# Altium PCB RP2040-Module.PcbDoc
Units mm, origin at the board's own origin, x right, y up, seen from the top; angles counter-clockwise.
Board outline 11.43 x 17.78 mm, 2 copper layers (Top Layer, Bottom Layer), stack 0.72 mm thick; 17 components, 47 nets, 134 pads, 39 vias.
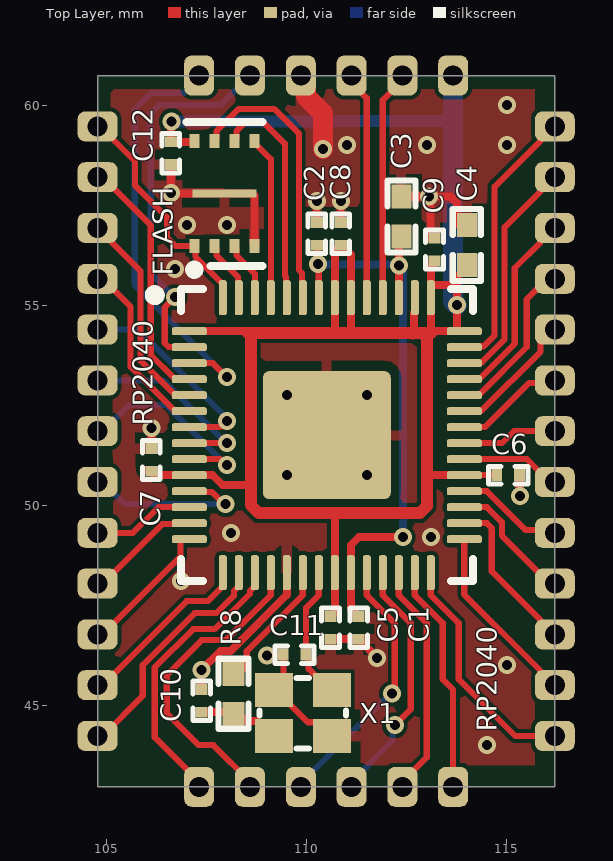
[diagram p0: Top Layer view]
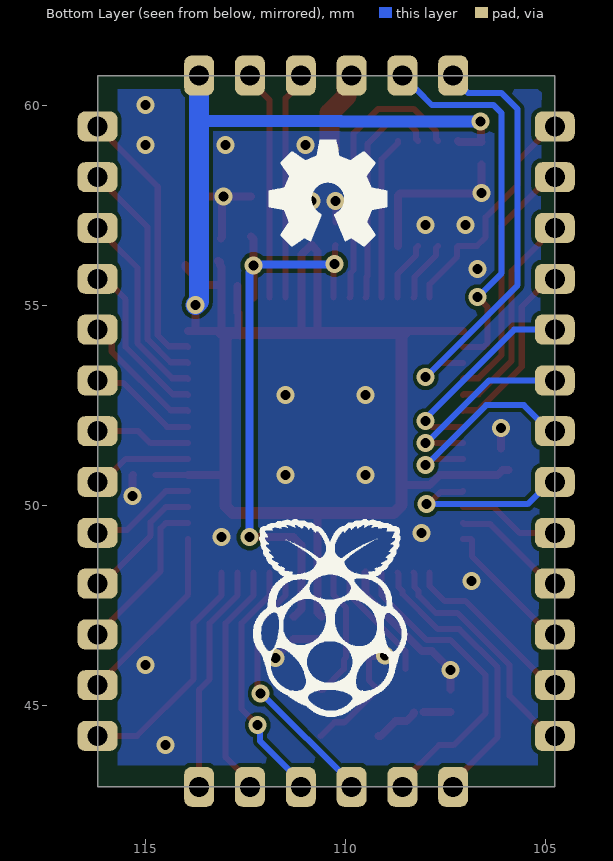
[diagram p1: Bottom Layer view, seen from below]
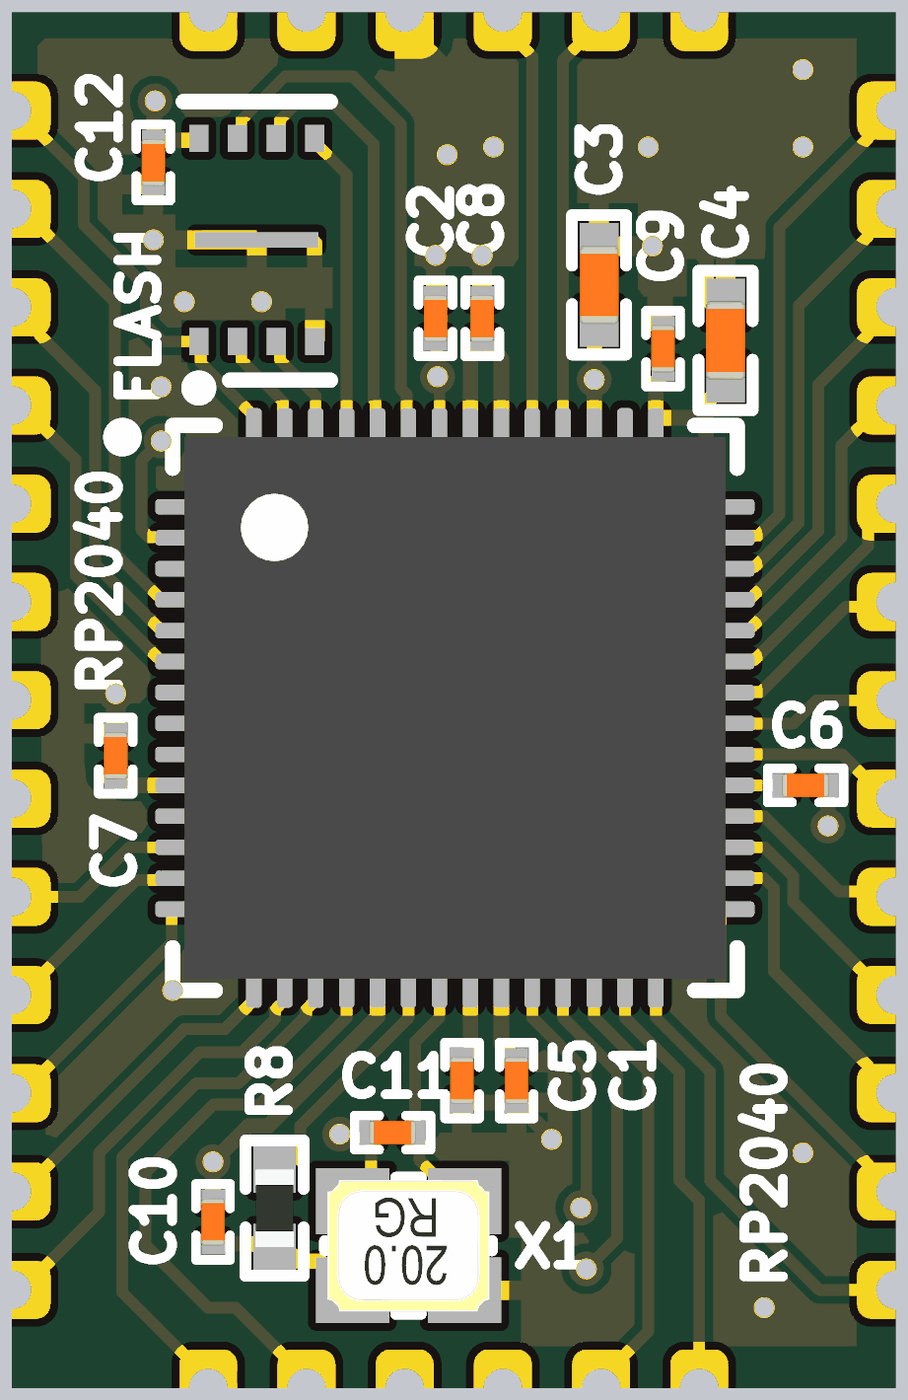
[diagram p2: 3D render of the assembled board from above, using the file's embedded part models]

## Layer stack, top to bottom
Top Solder: solder mask 0.0254, SM-001, Dk 4
Top Layer: signal copper 0.035
Dielectric 1: core 0.65, Core-043, Dk 4.3
Bottom Layer: signal copper 0.035
Bottom Solder: solder mask 0.0254, SM-001, Dk 4

## Board outline
104.77,42.96 116.2,42.96 116.2,60.74 104.77,60.74

## Design rules (kind name [scope] priority, off if disabled: settings)
Clearance [All] p1: gap=0.1 ignorepadtopadclearanceinfootprint=TRUE
ComponentClearance [All] p1 off: gap=0.254 collisioncheckmode=3 verticalgap=0.254 showdistances=FALSE
DiffPairsRouting [InDifferentialPair('DiffPair')] p1: maxlimit=0.254 minlimit=0.089 mostfreqgap=0.2 toplayer_minwidth=0.089 toplayer_maxwidth=0.381 toplayer_prefwidth=0.15 bottomlayer_minwidth=0.089 bottomlayer_maxwidth=0.381 bottomlayer_prefwidth=0.15 maxuncoupledlength=12.7
HoleSize [All] p1 off: absolutevalues=TRUE maxlimit=2.54 minlimit=0.025 maxpercent=80.000 minpercent=20.000
HoleToHoleClearance [All] p1 off: gap=0.254 allowstackedmicrovias=TRUE
MatchedLengths usb [InDifferentialPair('USB')] p1: tolerance=1 checknetsindiffpair=FALSE checkdiffpairvsdiffpair=TRUE checkxsignals=TRUE checkothers=TRUE
MinimumAnnularRing [IsVia] p1: minimumring=0.076
MinimumSolderMaskSliver [All] p1 off: minsoldermaskwidth=0.254
PlaneConnect [InNet('NetC11_2')] p1: planeconnectstyle=Direct reliefexpansion=0.508 reliefentries=4 reliefconductorwidth=0.254 reliefairgap=0.254
PolygonConnect [All] p1: thpad.connectstyle=Relief thpad.reliefconductorwidth=0.254 thpad.reliefentries=4 thpad.polygonreliefangle="90 Angle" thpad.airgapwidth=0.254 smdpad.connectstyle=Relief smdpad.reliefconductorwidth=0.254 smdpad.reliefentries=4 smdpad.polygonreliefangle="90 Angle" smdpad.airgapwidth=0.254 via.connectstyle=Direct via.reliefconductorwidth=0.254 via.reliefentries=4 via.polygonreliefangle="90 Angle" via.airgapwidth=0.254
PolygonConnect 3V3MCU [InNet('NetC11_2')] p2: connectstyle=Direct reliefconductorwidth=0.254 reliefentries=4 polygonreliefangle="90 Angle" airgapwidth=0.254
PolygonConnect VBUSMCU [InNet('NetC12_2')] p3: connectstyle=Direct reliefconductorwidth=0.254 reliefentries=4 polygonreliefangle="90 Angle" airgapwidth=0.254
PolygonConnect VUSB [InNet('VUSB')] p4: connectstyle=Direct reliefconductorwidth=0 reliefentries=4 polygonreliefangle="90 Angle" airgapwidth=0
PolygonConnect viagnd [InNet('GND')] p5: thpad.connectstyle=Relief thpad.reliefconductorwidth=0.254 thpad.reliefentries=4 thpad.polygonreliefangle="90 Angle" thpad.airgapwidth=0.254 smdpad.connectstyle=Relief smdpad.reliefconductorwidth=0.254 smdpad.reliefentries=4 smdpad.polygonreliefangle="90 Angle" smdpad.airgapwidth=0.254 via.connectstyle=Direct via.reliefconductorwidth=0.254 via.reliefentries=4 via.polygonreliefangle="90 Angle" via.airgapwidth=0.254
RoutingVias [All] p1: holewidth=0.2 width=0.4 viastyle="Through Hole" minholewidth=0.1 minwidth=0.2 maxholewidth=6.3 maxwidth=1.27
SilkToSilkClearance [All] p1 off: silktosilkclearance=0.254
SilkToSolderMaskClearance [IsPad] p1 off: minsilkscreentomaskgap=0.254 clearancetoexposedcopper=TRUE
SolderMaskExpansion [All] p1: expansion=0.102 istentingtop=FALSE
Width [All] p1: maxlimit=1 minlimit=0.081 preferedwidth=0.15
22 further rules are at their usual default settings.

## Classes and differential pairs
component class RP2040-Module: C1 C2 C3 C4 C5 C6 C7 C8 C9 C10 C11 C12 FLASH R8 RP2040 X1
differential pair USB: +USB_P -USB_N

## Components (designator, comment, footprint, x,y, rotation, side; value= is the part's Value field where it differs from the comment)
C1 "100nF" C0201 111.297,46.935 r90 top value=100pF
C2 "100nF" C0201 110.25,56.785 r270 top value=100pF
C3 "1uF" C0402 112.365,57.218 r270 top value=100pF
C4 "1uF" C0402 114,56.5 r270 top value=100pF
C5 "100nF" C0201 110.592,46.936 r90 top value=100pF
C6 "100nF" C0201 115.035,50.75 r180 top value=100pF
C7 "100nF" C0201 106.112,51.133 r270 top value=100pF
C8 "100nF" C0201 110.853,56.785 r270 top value=100pF
C9 "100nF" C0201 113.192,56.394 r270 top value=100pF
C10 "15pF" C0201 107.371,45.109 r90 top value=100pF
C11 "15pF" C0201 109.694,46.262 r180 top value=100pF
C12 "100nF" C0201 106.6,58.8 r90 top value=100pF
FLASH "GD25Q16CEIGR" GD25Q16CEIGR 107.188,56.486 r90 top locked
R8 "1K" RES0402 108.168,45.286 r90 top value=0R
RP2040 "DNP" RP2040-MODULE 104.77,45.5 r0 top locked
RP2040 "RP2040" RP2040 110.5,51.75 r0 top locked
X1 "12MHz" XTAL_2016 109.9,44.8 r180 top value=32MHz

## Footprints (in the part's own frame and the unit in brackets; to place one, negate y for a bottom-side part, rotate by r counter-clockwise, add the part's x,y. Pads: shape width x height; smd on the part's side, far side on the other; paste and mask are expansions set on the pad)
C0201 [mm]
  rect 0.27x0.3 smd: 1(-0.285,0) 2(0.285,0)
  silkscreen extent -0.49,-0.22 0.49,0.22, body extent -0.3,-0.15 0.31,0.15, height 0.3
C0402 [mm]
  rect 0.6x0.5 smd: 1(-0.5,0) 2(0.5,0)
  silkscreen extent -0.9,-0.35 0.9,0.35, body extent -0.51,-0.25 0.51,0.25, height 0.5
GD25Q16CEIGR [mm] "Flash SPI USON8 Package"
  rect 0.35x0.25 smd: 1(0,0) 2(0,-0.5) 3(0,-1) 4(0,-1.5) 5(2.625,-1.5) 6(2.625,-1) 7(2.625,-0.5) 8(2.625,0)
  rect 0.2x1.6 smd: 4(1.312,-0.75)
  silkscreen extent -0.7,-1.7 3.1,0.2, body extent -0.18,-1.74 2.82,0.26, height 0.45
RES0402 [mm]
  rect 0.6x0.55 smd: 1(-0.5,0) 2(0.5,0)
  silkscreen extent -0.87,-0.38 0.88,0.38, body extent -0.5,-0.25 0.5,0.25, height 0.3
RP2040 [mm]
  rrect50% 0.875x0.2 smd: 1(-3.437,2.6) 2(-3.437,2.2) 3(-3.437,1.8) 4(-3.437,1.4) 5(-3.437,1) 6(-3.437,0.6) 7(-3.437,0.2) 8(-3.437,-0.2) 9(-3.437,-0.6) 10(-3.437,-1) 11(-3.437,-1.4) 12(-3.437,-1.8) 13(-3.437,-2.2) 14(-3.437,-2.6) 29(3.437,-2.6) 30(3.437,-2.2) 31(3.437,-1.8) 32(3.437,-1.4) 33(3.437,-1) 34(3.437,-0.6) 35(3.437,-0.2) 36(3.437,0.2) 37(3.437,0.6) 38(3.437,1) 39(3.437,1.4) 40(3.437,1.8) 41(3.437,2.2) 42(3.437,2.6)
  rrect50% 0.2x0.875 smd: 15(-2.6,-3.437) 16(-2.2,-3.437) 17(-1.8,-3.437) 18(-1.4,-3.437) 19(-1,-3.437) 20(-0.6,-3.437) 21(-0.2,-3.437) 22(0.2,-3.437) 23(0.6,-3.437) 24(1,-3.437) 25(1.4,-3.437) 26(1.8,-3.437) 27(2.2,-3.437) 28(2.6,-3.437) 43(2.6,3.437) 44(2.2,3.437) 45(1.8,3.437) 46(1.4,3.437) 47(1,3.437) 48(0.6,3.437) 49(0.2,3.437) 50(-0.2,3.437) 51(-0.6,3.437) 52(-1,3.437) 53(-1.4,3.437) 54(-1.8,3.437) 55(-2.2,3.437) 56(-2.6,3.437)
  rrect10% 3.2x3.2 smd: 57(0,0)
  silkscreen extent -4.42,-3.65 3.65,3.65, body extent -3.5,-3.5 3.5,3.5, height 0.9
RP2040-MODULE [mm] "Module"
  rrect50% 0.75x1 hole 0.5: 1(3.81,15.24) 2(2.54,15.24) 15(2.54,-2.54) 16(3.81,-2.54) 17(8.89,-2.54) 31(5.08,-2.54) 33(6.35,-2.54) 34(8.89,15.24) 35(6.35,15.24) 36(7.62,15.24) 37(5.08,15.24) 38(7.62,-2.54)
  rrect50% 1x0.75 hole 0.5: 3(0,12.7) 4(0,11.43) 5(0,10.16) 6(0,8.89) 7(0,7.62) 8(0,6.35) 9(0,5.08) 10(0,3.81) 11(0,2.54) 12(0,1.27) 13(0,0) 14(0,-1.27) 18(11.43,-1.27) 19(11.43,0) 20(11.43,1.27) 21(11.43,2.54) 22(11.43,3.81) 23(11.43,5.08) 24(11.43,6.35) 25(11.43,7.62) 26(11.43,8.89) 27(11.43,10.16) 28(11.43,11.43) 29(11.43,12.7) 30(11.43,13.97) 32(0,13.97)
XTAL_2016 [mm]
  rect 0.95x0.85 smd: 1(-0.725,-0.575) 2(0.725,-0.575) 3(0.725,0.575) 4(-0.725,0.575)
  silkscreen extent -1.08,-0.88 1.08,0.88, body extent -1.05,-0.85 1.05,0.85, height 0.56

## Part data
C1 C2 C3 C4 C5 C6 C7 C8 C9 C10 C11 C12: library part CAP, "Capacitor", Published=8-Jun-2000, Publisher="Altium Limited", Revision="July-2002: Re-released for DXP Platform."
FLASH: library part "Flash SPI", "Flash SPI 16Mb = 2 MB", Supplier Part Number 1=363-GD25Q16CEIGR, Supplier 1=Mouser
R8: "Resistor, Â±5%, 0.05W", Part Number=R0201-0R, Part number IPS=00000003245, Artikkelnr Noca=N.A., ComponentLink1Description=Datasheet, ComponentLink2Description="Supplier link", Footprint Doc=0201, LatestRevisionDate=2017-11-09, Note="Chip Res 5%", Pin Count=2, Published=2014-11-13, Publisher="Nordic Semiconductor"
RP2040: library part RP2040-Module, "RP2040-Module"
RP2040: "RP2040 First MCU from RPI"
X1: "XTAL SMD 2016, 32MHz, Cl=8pF, Total Tol: Â±40ppm", Part Number=XTAL_SMD2016_32MHz_8pF_General, Footprint Doc=XTAL_2016, LatestRevisionDate=2016-08-19, Pin Count=4, Published=2016-08-19, Publisher="Nordic Semiconductor"

## Via types
v1: diameter 0.45, hole 0.25, Top Layer to Bottom Layer, tented both sides, 39 vias

## Nets (pads, with @x,y where several pads share a name; then routed paths per layer and width w, separated by ;. In a path a pad name is that pad's centre, name@x,y a point inside that pad or via, vN(x,y) a via of type N, cw(c..) or ccw(c..) an arc to the next point about the centre after c; other vN are vias at no path point)
1V1: C1.2 C2.2 C3.2 RP2040.23@111.1,48.313 RP2040.45 RP2040.50 | length 15
  Top Layer w0.152: C2.2 110.262,56.488 110.262,56.044 v1(110.275,56.031) ; v1@110.282,56.031 110.3,56.013 RP2040.50
  Top Layer w0.2: C1.2 111.282,47.22 111.1,47.402 111.1,48.313 111.1,49 111.3,49.2 v1(112.4,49.2) ; RP2040.45@112.301,55.188 v1(112.301,55.996) ; v1(112.301,55.996) 112.301,56.655 C3.2
  Bottom Layer w0.2: v1(110.275,56.031) 110.293,56.013 112.283,56.013 v1(112.301,55.996) 112.301,55.928 112.4,55.829 v1(112.4,49.2)
3V3: C4.2 C5.2 C6.2 C7.2 C8.2 C9.2 C12.2 FLASH.8 RP2040.1@107.063,54.35 RP2040.10@107.063,50.75 RP2040.22@110.7,48.313 RP2040.33@113.937,50.75 RP2040.34@113.66,60.74 RP2040.42 RP2040.43 RP2040.44 RP2040.48 RP2040.49 | length 51.5
  Top Layer w0.152: RP2040.33@113.937,50.75 C6.2
  Top Layer w0.2: 105.925,50.874 106.079,50.874 106.202,50.75 107.063,50.75 107.649,50.75 107.899,50.5 108.5,50.5 ; v1(106.623,59.596) 106.611,59.584 106.611,59.096 C12.2 107.163,59.085 FLASH.8 ; RP2040.1@107.063,54.35 108.482,54.35 108.532,54.3 ; C5.2 110.607,47.221 110.7,47.313 110.7,48.313 110.7,49.788 110.712,49.8 ; 110.7,54.3 RP2040.49 110.7,56.347 110.803,56.45 110.803,56.465 110.838,56.5 C8.2 110.868,56.5 111.1,56.268 RP2040.48 111.1,54.6 111.1,54.3 ; 112.642,54.242 112.682,54.282 112.682,54.3 112.682,54.803 112.7,54.821 RP2040.44 RP2040.44@112.7,55.476 ; 113,50.8 113.05,50.75 RP2040.33@113.937,50.75 ; 113,54.191 113.159,54.35 RP2040.42@113.75,54.35 ; 113.1,54.3 RP2040.43 RP2040.43@113.1,55.5 ; C9.2 113.177,56.109 113.142,56.074 113.142,55.999 113.1,55.957 RP2040.43@113.1,55.5 ; RP2040.42 RP2040.42@113.75,54.35 ; C4.2 114,55.95 113.75,55.7 113.75,55.5 ; RP2040.43@113.1,55.5 113.75,55.5 ; RP2040.42@113.75,54.35 v1(113.75,55) 113.75,55.5
  Top Layer w0.3: 108.532,54.3 108.6,54.3 ; 113.1,54.3 112.891,54.3 ; 108.6,54.3 108.6,50.5 108.6,50 108.8,49.8 110.712,49.8 112.824,49.8 113,49.976 113,50.8 113,54.191 112.891,54.3 ; 108.6,54.3 110.7,54.3 111.1,54.3 112.682,54.3 112.891,54.3
  Bottom Layer w0.3: v1(106.623,59.596) 110.109,59.596 110.114,59.6 113.66,59.6
  Bottom Layer w0.5: RP2040.34@113.66,60.74 113.66,59.6 113.66,55.09 v1(113.75,55)
A0: RP2040.27@116.2,55.66 RP2040.38@113.937,52.75 | length 4
  Top Layer w0.152: RP2040.38@113.937,52.75 113.961,52.774 114.319,52.774 115.5,53.955 115.5,55.145 RP2040.27@116,55.645
A1: RP2040.28@116.2,56.93 RP2040.39 | length 5
  Top Layer w0.152: RP2040.39 113.961,53.174 114.335,53.174 115.2,54.039 115.2,55.93 115.845,56.575 115.845,56.64 116.135,56.93 RP2040.28@116.2,56.93
A2: RP2040.29@116.2,58.2 RP2040.40 | length 5.9
  Top Layer w0.152: RP2040.40 113.961,53.574 114.378,53.574 114.948,54.144 114.948,56.948 115.845,57.845 115.845,57.91 116.135,58.2 RP2040.29@116.2,58.2
A3: RP2040.30@116.2,59.47 RP2040.41 | length 6.8
  Top Layer w0.152: RP2040.41 113.961,53.974 114.421,53.974 114.695,54.248 114.695,57.965 115.845,59.115 115.845,59.18 116.135,59.47 RP2040.30@116.2,59.47
GND: C1.1 C2.1 C3.1 C4.1 C5.1 C6.1 C7.1 C8.1 C9.1 C10.2 C11.2 C12.1 FLASH.4 RP2040.19@109.5,48.313 RP2040.37@109.85,60.74 RP2040.57 X1.2 X1.4 | length 20
  Top Layer w0.152: v1@109.017,46.18 109.037,46.2 109.415,46.2 109.415,45.615 X1.2 109.225,45.375 110.026,44.574 110.276,44.574 X1.4 ; C2.1 v1(110.25,57.6) ; C8.1 v1(110.853,57.6)
  Top Layer w0.2: C7.1 v1(106.112,51.933) ; C12.1 v1(106.6,57.8) 106.602,57.798 107.938,57.798 108.638,57.798 108.688,57.748 FLASH.4@108.688,56.486 ; C10.2 v1(107.371,45.884) 107.837,46.349 108.089,46.349 109.5,47.759 RP2040.19@109.5,48.313 ; C5.1 C1.1 ; C1.1 111.77,46.178 111.747,46.178 v1(111.75,46.175) ; C3.1 112.366,57.72 v1(113.054,57.72) ; C9.1@113.119,56.669 113.087,56.701 113.087,57.688 v1(113.054,57.72) ; C4.1@113.8,57 113.75,57.05 113.75,57.558 113.588,57.72 v1(113.054,57.72) ; C6.1 115.322,50.747 115.322,50.228 v1(115.325,50.225)
  Top Layer w0.5: RP2040.37@109.85,60.74 109.975,60.615 109.975,60.225 110.4,59.8 v1(110.4,58.9)
  other v1: 114.5,44 115,46 109.011,46.242 106.85,48.1 113.1,49.2 108.1,49.3 109.5,50.75 111.5,50.75 109.5,52.75 111.5,52.75 106.7,55.9 107,57 108,57 111,59 113,59 115,59 115,60
GP0: RP2040.1@108.58,60.74 RP2040.2@107.063,53.95 | length 9.7
  Top Layer w0.152: v1(106.7,55.2) 106.449,54.949 106.449,54.051 106.543,53.957 107.055,53.957 RP2040.2@107.063,53.95
  Bottom Layer w0.152: v1(106.7,55.2) 106.1,55.8 106.1,59.8 106.3,60 107.84,60 108.225,60.385 108.29,60.385 108.58,60.675 RP2040.1@108.58,60.74
GP1: RP2040.2@107.31,60.74 RP2040.3@107.063,53.55 | length 10.7
  Top Layer w0.152: RP2040.3@107.063,53.55 107.65,53.55 v1(108,53.2)
  Bottom Layer w0.152: RP2040.2@107.31,60.74 107.31,60.675 106.935,60.3 106.1,60.3 105.7,59.9 105.7,55.5 v1(108,53.2)
GP2: RP2040.3@104.77,58.2 RP2040.4@107.063,53.15 | length 6.3
  Top Layer w0.152: RP2040.3@104.77,58.2 104.895,58.2 106.1,56.995 106.1,53.755 106.681,53.174 107.039,53.174 RP2040.4@107.063,53.15
GP3: RP2040.4@104.77,56.93 RP2040.5@107.063,52.75 | length 5.4
  Top Layer w0.152: RP2040.4@104.77,56.93 104.835,56.93 105.125,56.64 105.125,56.575 105.848,55.852 105.848,53.608 106.681,52.774 107.039,52.774 RP2040.5@107.063,52.75
GP4: RP2040.5@104.77,55.66 RP2040.6@107.063,52.35 | length 4.5
  Top Layer w0.152: RP2040.5@104.77,55.66 104.895,55.66 105.595,54.96 105.595,53.46 106.681,52.374 107.039,52.374 RP2040.6@107.063,52.35
GP5: RP2040.6@104.77,54.39 RP2040.7@107.063,51.95 | length 5.2
  Top Layer w0.152: RP2040.7@107.063,51.95 107.833,51.95 107.983,52.1 v1(108,52.1)
  Bottom Layer w0.152: RP2040.6@104.77,54.39 105.784,54.39 108,52.174 v1(108,52.1)
GP6: RP2040.7@104.77,53.12 RP2040.8@107.063,51.55 | length 4.8
  Top Layer w0.152: RP2040.8@107.063,51.55 v1(108,51.55)
  Bottom Layer w0.152: RP2040.7@104.77,53.12 106.413,53.12 107.983,51.55 v1(108,51.55)
GP7: RP2040.8@104.77,51.85 RP2040.9@107.063,51.15 | length 5.1
  Top Layer w0.152: RP2040.9@107.063,51.15 107.833,51.15 107.983,51 v1(108,51)
  Bottom Layer w0.152: RP2040.8@104.77,51.85 104.895,51.85 105.545,52.5 106.483,52.5 107.983,51 v1(108,51)
GP8: RP2040.9@104.77,50.58 RP2040.11@107.063,50.35 | length 4.5
  Top Layer w0.152: RP2040.11@107.063,50.35 107.086,50.326 107.631,50.326 107.931,50.027 v1(107.973,50.027)
  Bottom Layer w0.15: RP2040.9@104.77,50.58 104.895,50.58 105.448,50.027
  Bottom Layer w0.152: 105.448,50.027 v1(107.973,50.027)
GP9: RP2040.10@104.77,49.31 RP2040.12@107.063,49.95 | length 2.6
  Top Layer w0.15: RP2040.10@104.77,49.31 105.654,49.31 106.294,49.95
  Top Layer w0.152: 106.294,49.95 RP2040.12@107.063,49.95
GP10: RP2040.11@104.77,48.04 RP2040.13@107.063,49.55 | length 2.9
  Top Layer w0.152: RP2040.11@104.77,48.04 104.895,48.04 106.381,49.526 107.039,49.526 RP2040.13@107.063,49.55
GP11: RP2040.12@104.77,46.77 RP2040.14@107.063,49.15 | length 3.5
  Top Layer w0.15: RP2040.12@104.77,46.77 104.895,46.77 106.837,48.712 106.837,49.125 106.862,49.15 RP2040.14@107.063,49.15
GP12: RP2040.13@104.77,45.5 RP2040.15@107.9,48.313 | length 4.5
  Top Layer w0.152: RP2040.13@104.77,45.5 104.9,45.5 107,47.6 107.525,47.6 107.9,47.975 RP2040.15@107.9,48.313
GP13: RP2040.14@104.77,44.23 RP2040.16@108.3,48.313 | length 5.9
  Top Layer w0.152: RP2040.14@104.77,44.23 104.895,44.23 105.9,45.235 105.9,46 107.2,47.3 107.74,47.3 108.176,47.736 108.176,47.851 108.276,47.951 108.276,48.289 RP2040.16@108.3,48.313
GP14: RP2040.15@107.31,42.96 RP2040.17@108.7,48.313 | length 7.2
  Top Layer w0.15: 106.2,44.195 107.31,43.085 RP2040.15@107.31,42.96
  Top Layer w0.152: 106.2,44.195 106.2,45.943 107.157,46.9 107.697,46.9 108.576,47.779 108.576,47.851 108.676,47.951 108.676,48.289 RP2040.17@108.7,48.313
GP15: RP2040.16@108.58,42.96 RP2040.18@109.1,48.313 | length 8.2
  Top Layer w0.152: 106.5,45.1 106.5,44.8 ; RP2040.16@108.58,42.96 108.58,43.085 107.665,44 107.3,44 106.5,44.8 ; RP2040.18@109.1,48.313 109.1,47.75 107.975,46.625 107.375,46.625 106.5,45.75 106.5,44.8
GP16: RP2040.17@113.66,42.96 RP2040.27@112.7,48.313 | length 5.8
  Top Layer w0.152: RP2040.27@112.7,48.313 112.7,47.75 113.4,47.05 113.4,45.646 113.66,45.386 RP2040.17@113.66,42.96
GP17: RP2040.18@116.2,44.23 RP2040.28@113.1,48.313 | length 5.9
  Top Layer w0.152: RP2040.28@113.1,48.313 113.1,47.75 113.8,47.05 113.8,45.646 115.216,44.23 RP2040.18@116.2,44.23
GP18: RP2040.19@116.2,45.5 RP2040.29@113.937,49.15 | length 4.6
  Top Layer w0.152: RP2040.29@113.937,49.15 113.937,47.763 115.845,45.855 115.845,45.79 116.135,45.5 RP2040.19@116.2,45.5
GP19: RP2040.20@116.2,46.77 RP2040.30@113.937,49.55 | length 4.1
  Top Layer w0.152: RP2040.30@113.937,49.55 114.5,49.55 114.624,49.426 114.624,48.346 115.845,47.125 115.845,47.06 116.135,46.77 RP2040.20@116.2,46.77
GP20: RP2040.21@116.2,48.04 RP2040.31@113.937,49.95 | length 3.2
  Top Layer w0.152: RP2040.31@113.937,49.95 114.5,49.95 114.876,49.574 114.876,49.239 116.075,48.04 RP2040.21@116.2,48.04
GP21: RP2040.22@116.2,49.31 RP2040.32@113.937,50.35 | length 2.7
  Top Layer w0.152: RP2040.32@113.937,50.35 114.5,50.35 115.471,49.379 116.131,49.379 RP2040.22@116.2,49.31
GP22: RP2040.23@116.2,50.58 RP2040.34@113.937,51.15 | length 2.5
  Top Layer w0.152: RP2040.34@113.937,51.15 115.505,51.15 116.075,50.58 RP2040.23@116.2,50.58
GP23: RP2040.24@116.2,51.85 RP2040.35@113.937,51.55 | length 2.4
  Top Layer w0.152: RP2040.35@113.937,51.55 114.88,51.55 115.18,51.85 RP2040.24@116.2,51.85
GP24: RP2040.25@116.2,53.12 RP2040.36@113.937,51.95 | length 2.7
  Top Layer w0.152: RP2040.36@113.937,51.95 113.944,51.956 114.458,51.956 115.561,53.059 116.139,53.059 RP2040.25@116.2,53.12
GP25: RP2040.26@116.2,54.39 RP2040.37@113.937,52.35 | length 3.3
  Top Layer w0.152: RP2040.37@113.937,52.35 113.961,52.374 114.377,52.374 115.845,53.842 115.845,54.1 116.135,54.39 RP2040.26@116.2,54.39
NetC10_1: C10.1 R8.1 X1.3 | length 1.8
  Top Layer w0.2: C10.1 R8.1@108.056,44.824 ; R8.1@108.285,44.815 108.3,44.8 108.3,44.775 108.475,44.6 108.75,44.6 109.125,44.225 X1.3
QSPI_SCLK: FLASH.6 RP2040.52 | length 5.6
  Top Layer w0.15: FLASH.6 108.238,59.161 108.238,59.35 108.449,59.561 108.927,59.561 109.45,59.038 109.45,55.735 109.475,55.71 109.475,55.212 RP2040.52
QSPI_SD0: FLASH.5 RP2040.53 | length 4.1
  Top Layer w0.15: FLASH.5 108.688,59.061 109.1,58.649 RP2040.53
QSPI_SD1: FLASH.2 RP2040.55 | length 1.6
  Top Layer w0.15: FLASH.2 107.738,56.436 107.738,56.247 108.275,55.71 108.275,55.212 RP2040.55
QSPI_SD2: FLASH.3 RP2040.54 | length 1.5
  Top Layer w0.15: FLASH.3 108.238,56.436 108.238,56.247 108.7,55.785 RP2040.54
QSPI_SD3: FLASH.7 RP2040.51 | length 7
  Top Layer w0.15: FLASH.7 107.738,59.161 107.738,59.35 108.299,59.911 109.185,59.911 109.8,59.296 109.8,55.88 109.875,55.805 109.875,55.212 RP2040.51
QSPI_SS: FLASH.1 RP2040.32@104.77,59.47 RP2040.56 | length 5.9
  Top Layer w0.15: RP2040.32@104.77,59.47 104.834,59.47 105.194,59.11 105.7,58.604 105.7,58 106.5,57.2 106.5,56.7 106.714,56.486 FLASH.1 107.213,56.461 107.213,56.212 107.9,55.525 RP2040.56
RUN: RP2040.26@112.3,48.313 RP2040.38@112.39,42.96 | length 5.9
  Top Layer w0.152: RP2040.26@112.3,48.313 112.3,47.75 113,47.05 113,43.695 112.39,43.085 RP2040.38@112.39,42.96
SWCLK: RP2040.24@111.5,48.313 RP2040.31@109.85,42.96 | length 6.6
  Top Layer w0.152: RP2040.24@111.5,48.313 111.5,47.75 112.2,47.05 112.2,45.363 v1(112.127,45.29)
  Bottom Layer w0.152: RP2040.31@109.85,42.96 109.85,43.049 112.091,45.29 v1(112.127,45.29)
SWDIO: RP2040.25@111.9,48.313 RP2040.33@111.12,42.96 | length 6.3
  Top Layer w0.152: RP2040.25@111.9,48.313 111.9,47.75 112.6,47.05 112.6,44.9 v1(112.2,44.5)
  Bottom Layer w0.152: RP2040.33@111.12,42.96 111.12,43.085 112.143,44.108 112.143,44.443 v1(112.2,44.5)
USB_N: RP2040.36@112.39,60.74 RP2040.46 | length 6.6
  Top Layer w0.152: 111.899,56.051 111.899,55.188 111.9,60.125 112.39,60.615 RP2040.36@112.39,60.74
USB_P: RP2040.35@111.12,60.74 RP2040.47 | length 5.7
  Top Layer w0.152: RP2040.35@111.12,60.74 111.12,60.555 111.5,60.175 RP2040.47
XIN: C11.1 RP2040.21@110.3,48.313 X1.1 | length 3.4
  Top Layer w0.152: RP2040.21@110.3,48.313 110.3,47.75 109.985,47.435 109.985,46.2 110.044,46.141 110.044,45.906 110.575,45.375 X1.1
XOUT: R8.2 RP2040.20@109.9,48.313 | length 3
  Top Layer w0.152: 108.5,45.9 108.5,46.35 109.9,47.75 RP2040.20@109.9,48.313

## Polygon pours and split planes (outlines as drawn)
GND on Bottom Layer "NONET_L-01_P-001" (solid, pour order 8): 105.1,60.4 115.7,60.4 115.7,43.5 105.2,43.5
GND on Bottom Layer "NONET_L-01_P-001" (solid, pour order 5): 108.9,53.35 112.1,53.35 112.1,50.15 108.9,50.15
no net on Bottom Solder "NONET_L-01_P-001" (solid, pour order 6): 108.9,53.35 112.1,53.35 112.1,50.15 108.9,50.15
GND on Top Layer "NONET_L-01_P-001" (solid, pour order 7): 105.1,60.4 115.7,60.4 115.7,43.5 105.2,43.5

## Silkscreen, mask and mechanical layers (free items; w line width, h text height)
Bottom Overlay:
  drawing of 4 lines, arcs and shapes, not listed
Mechanical 1:
  lines w0: 104.77,60.69 104.77,42.96 116.2,42.96 116.2,60.74 104.77,60.74

## Dimensions
116.2,60.74 to 116.2,42.96 on Mechanical 1
104.77,60.74 to 116.2,60.74 on Mechanical 1